# Allegro board tutorial.brd
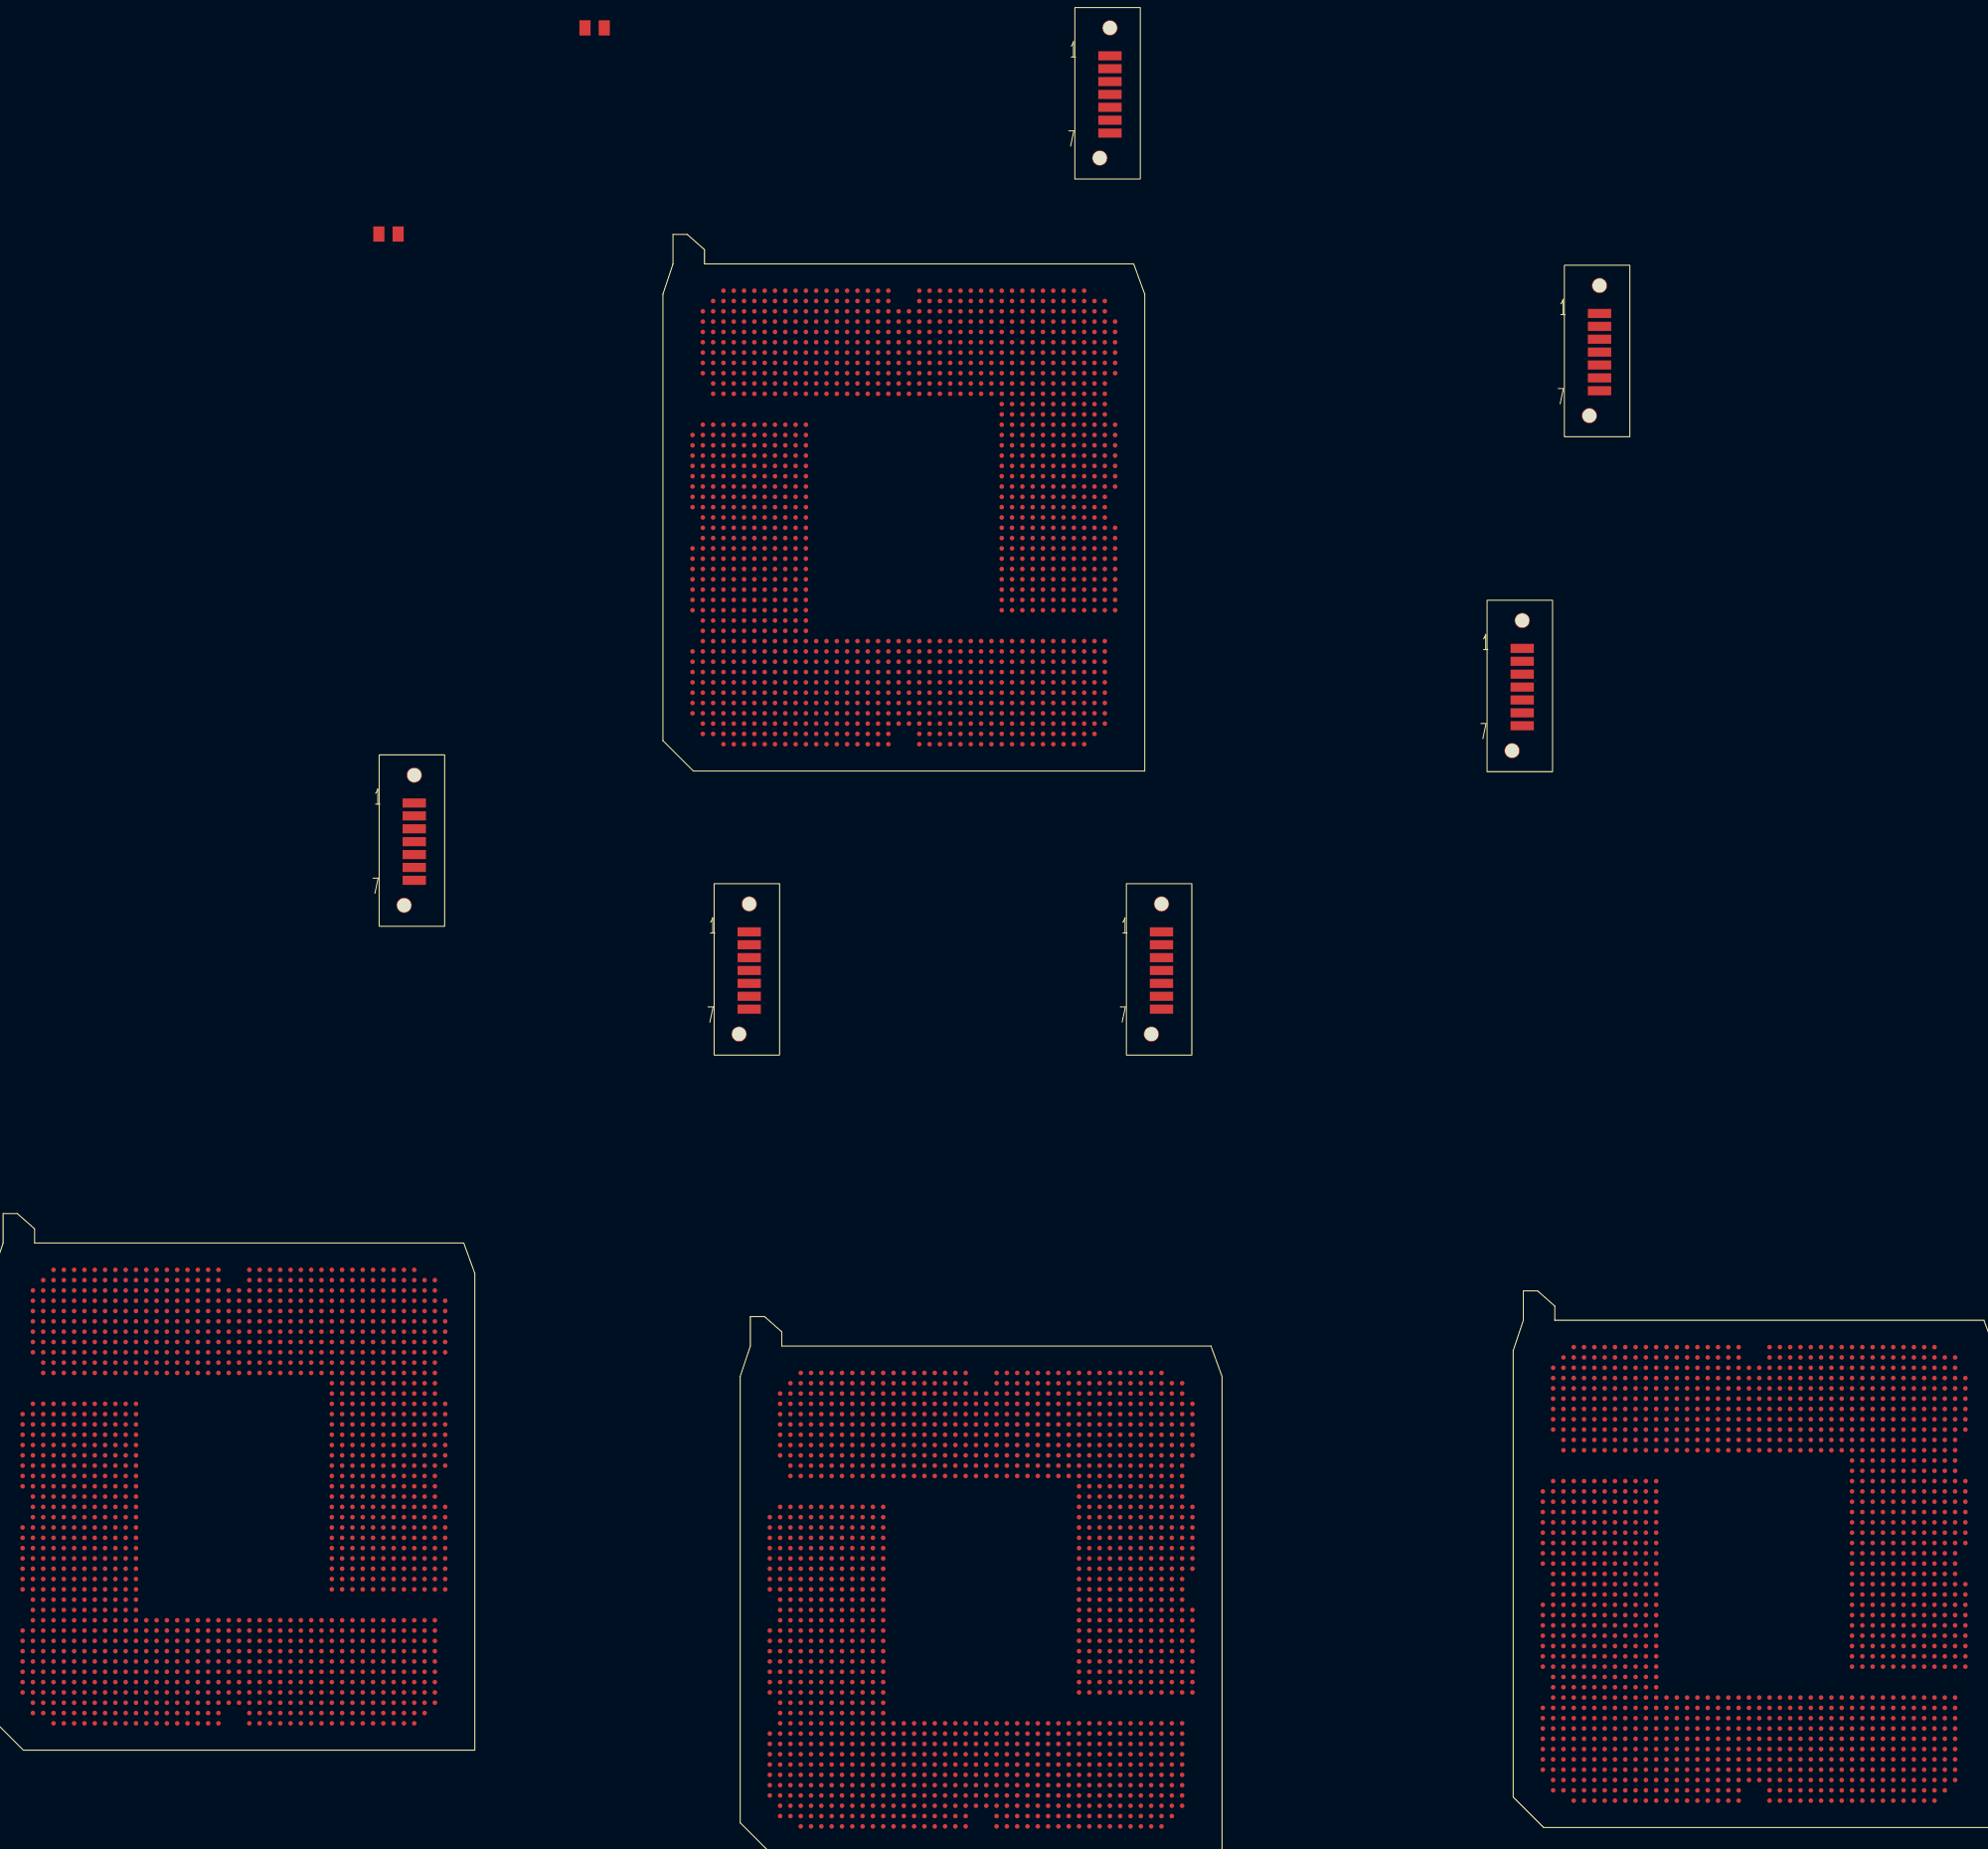
[diagram p0: board, top side]
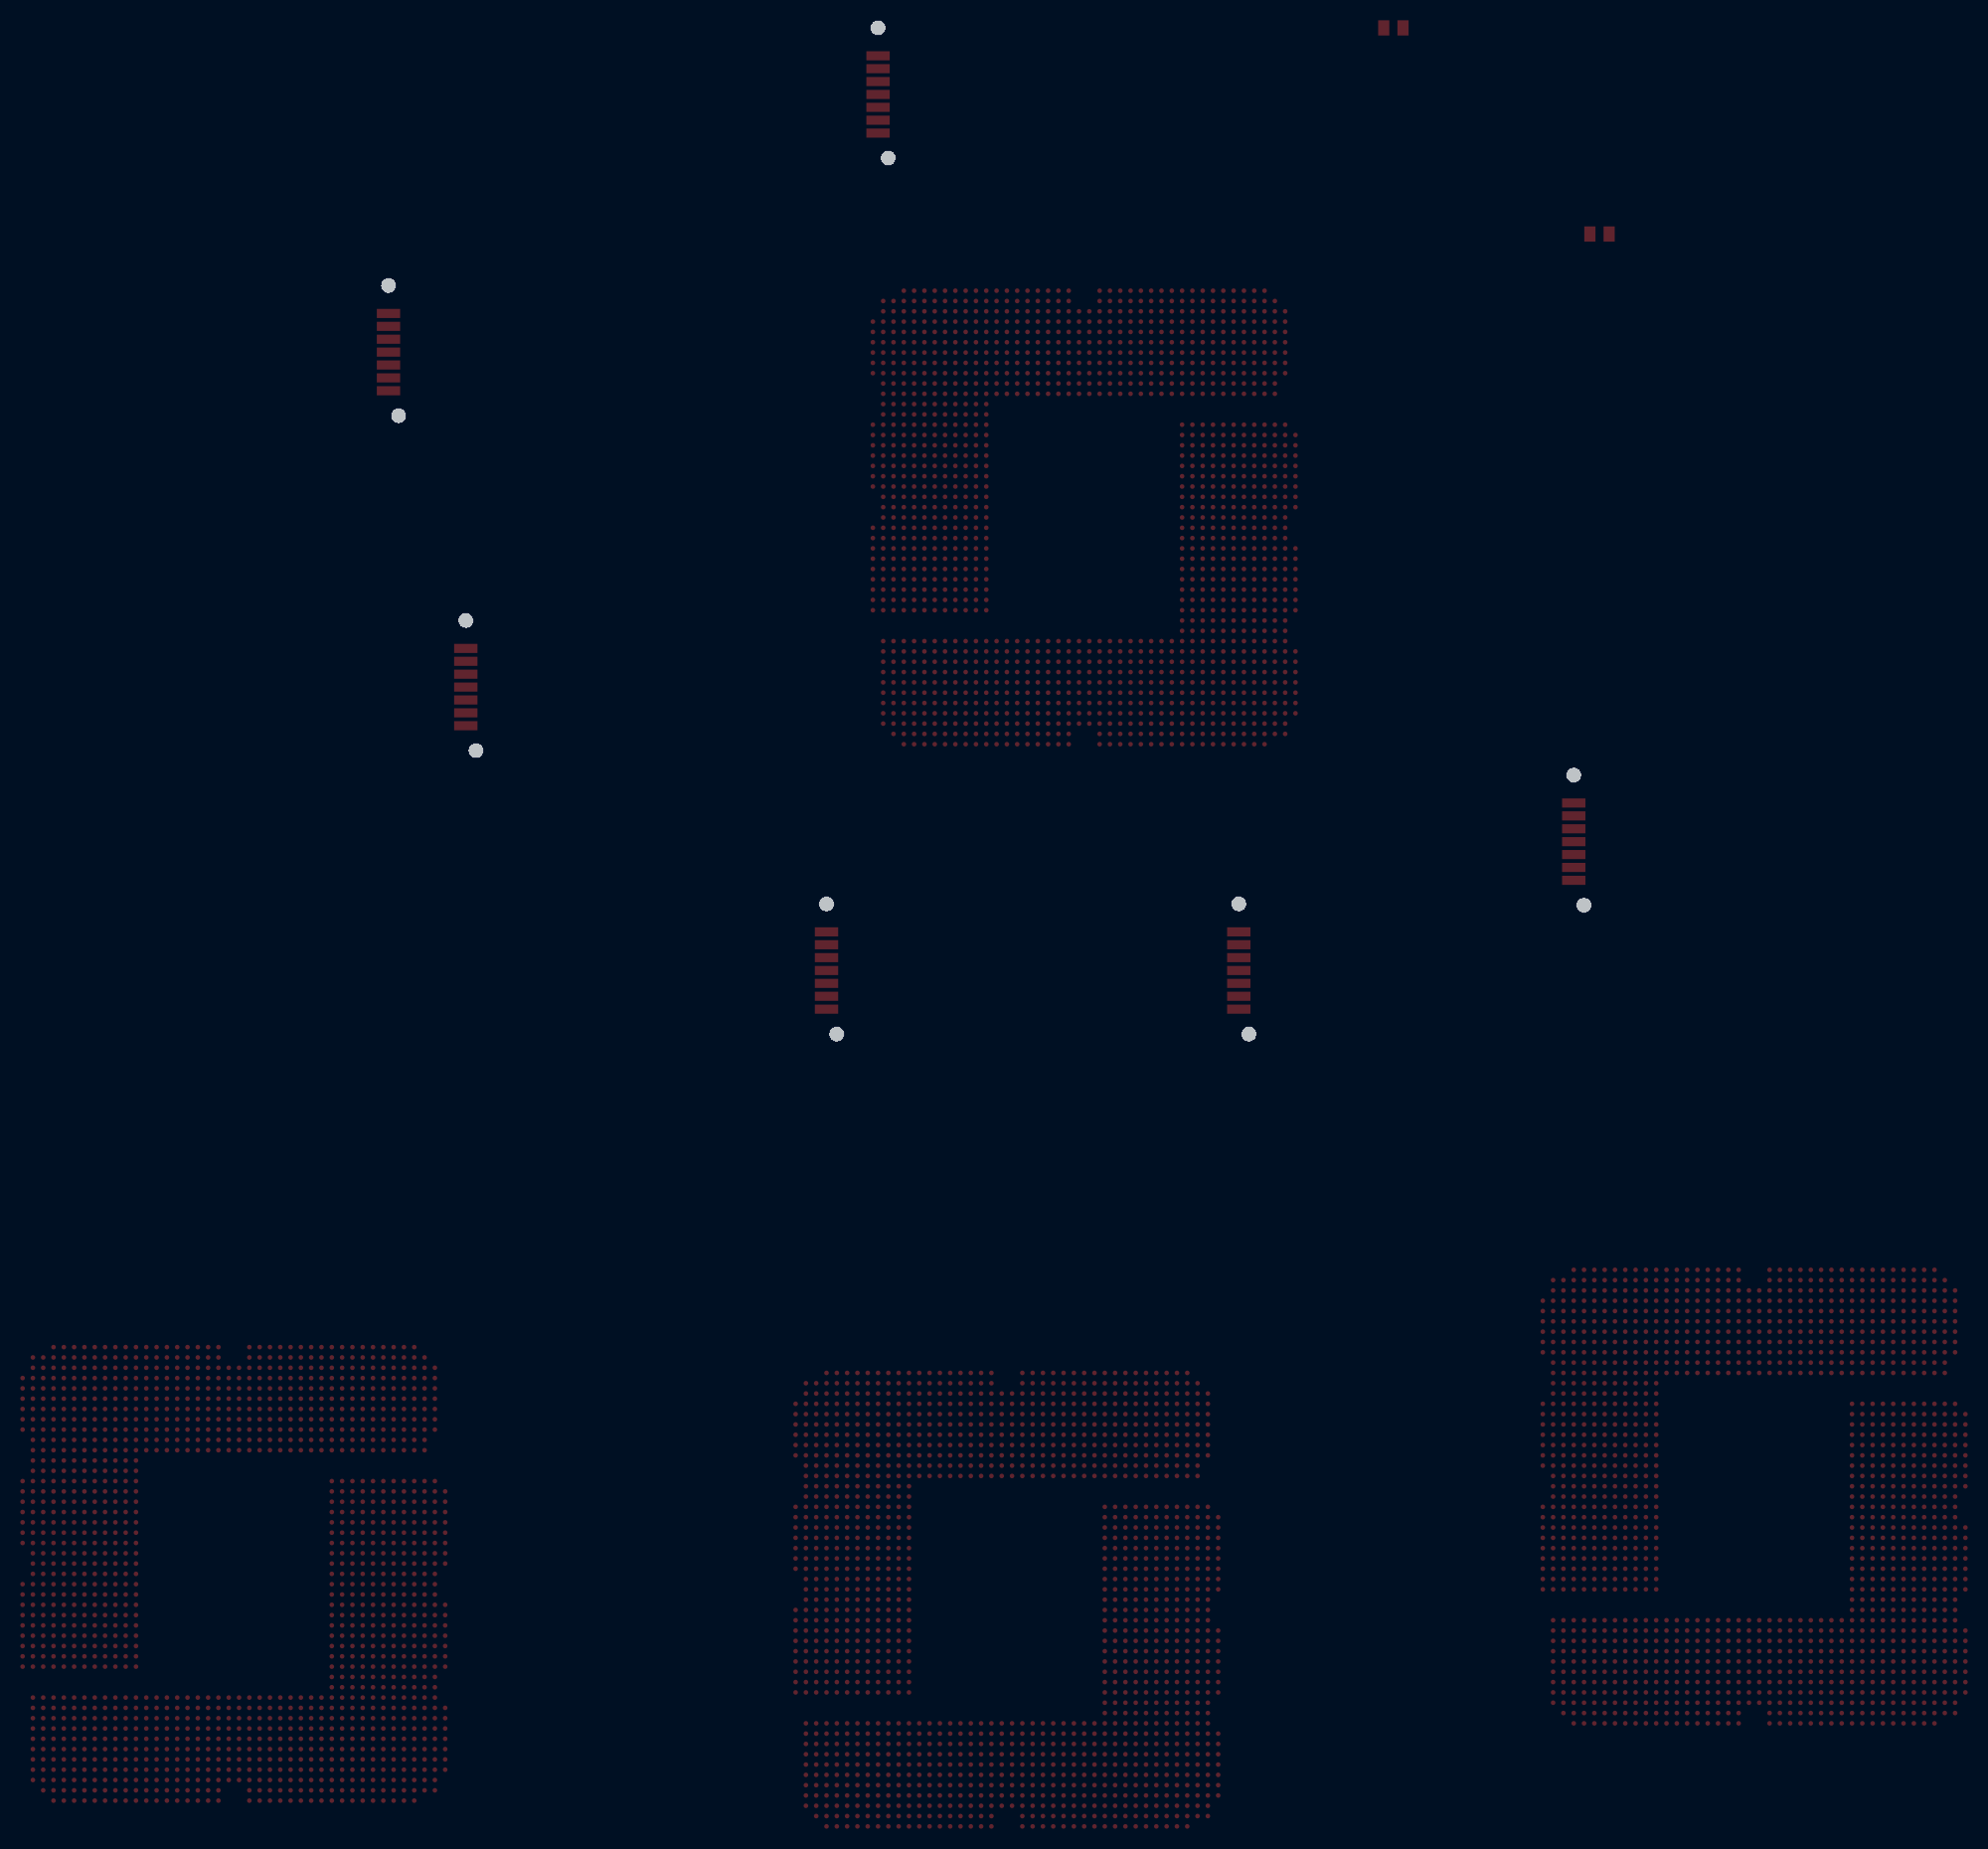
[diagram p1: board, bottom side, seen from below]

No outline. copper layers: TOP, GND_2, SIG_3H, SIG_4V, PWR_5, SIG_6H, SIG_7V, PWR_8, GND_9, PWR_10, GND_11, SIG_12H, SIG_13V, GND_14, SIG_15V, SIG_16V, PWR_17, BOTTOM. Coordinates in mm from the lowest, leftmost part position.

## Design rules (mm)
constraint set DEFAULT: min track width 0.102, pair gap 0.102
net group SATA_TX_P<1>: nets SATA_TX_P<1> SATA_TX_P_X<1>
net group SATA_TX_P<4>: nets _N93 SATA_TX_P<4>
net group VIDBUS: nets PRDY* PSI*
net group BPM_BUS: nets BPM_BUS<0> BPM_BUS<1> BPM_BUS<2> BPM_BUS<3> BPM_BUS<4> BPM_BUS<5> BPM_BUS<6> BPM_BUS<7>
net group DDR_COMP: nets DDR_COMP<0> DDR_COMP<1> DDR_COMP<2>
net group SATA_RX_N: nets SATA_RX_N<0> SATA_RX_N<1> SATA_RX_N<2> SATA_RX_N<3> SATA_RX_N<4> SATA_RX_N<5>
net group SATA_RX_P: nets SATA_RX_P<0> SATA_RX_P<1> SATA_RX_P<2> SATA_RX_P<3> SATA_RX_P<4> SATA_RX_P<5>
net group SATA_TX_N: nets SATA_TX_N<0> SATA_TX_N<1> SATA_TX_N<2> SATA_TX_N<3> SATA_TX_N<4> SATA_TX_N<5>
net group SATA_TX_P: nets SATA_TX_P<0> SATA_TX_P<2> SATA_TX_P<3> SATA_TX_P<5>
net group VID: nets VID<1> VID<2> VID<3> VID<4> VID<5> VID<6> VID<7>

## Placement (name value [footprint] x y rotation side)
J2  -  [SATA_VERT1P27]  50.8 68.58 0 top
J101  -  [SATA_VERT1P27]  86.36 154.94 0 top
J0501  -  [SATA_VERT1P27]  17.78 81.28 0 top
J0502  -  [SATA_VERT1P27]  91.44 68.58 0 top
J0503  -  [SATA_VERT1P27]  127 96.52 0 top
J0504  -  [SATA_VERT1P27]  134.62 129.54 0 top
R0500  1.1K  [RESC2012N]  35.56 154.94 0 top
R0501  1.1K  [RESC2012N]  15.24 134.62 0 top
U0500  -  [LGA1366_SKT]  66.04 106.68 0 top
U0501  -  [LGA1366_SKT]  73.66 0 0 top
U0504  -  [LGA1366_SKT]  0 10.16 0 top
U0509  -  [LGA1366_SKT]  149.86 2.54 0 top

## Library data of the parts
J2 J101 J0501 J0502 J0503 J0504 = SATA: part number: SATA_TH-CDN-CON-0014
R0500 R0501 = RES: part number: RES_0805-CDN-RES-0290,1.1K,0.125W,1%
U0500 U0501 U0504 U0509 = VIPER_ASIC: part number: VIPER_ASIC_FCBGA-CDN-MPU-000009

## Footprints (pads in the part's own frame, mm; a bottom-side part is the same pattern mirrored in y, then rotated)
LGA1366_SKT
  round 0.457 smd: A4(-20.828,-19.304) A5(-20.828,-18.288) A6(-20.828,-17.272) A7(-20.828,-16.256) A8(-20.828,-15.24) A9(-20.828,-14.224) A10(-20.828,-13.208) A14(-20.828,-9.144) A15(-20.828,-8.128) A16(-20.828,-7.112) A17(-20.828,-6.096) A18(-20.828,-5.08) A19(-20.828,-4.064) A20(-20.828,-3.048) A24(-20.828,1.016) A25(-20.828,2.032) A26(-20.828,3.048) A27(-20.828,4.064) A28(-20.828,5.08) A29(-20.828,6.096) A30(-20.828,7.112) A31(-20.828,8.128) A35(-19.812,14.224) A36(-19.812,15.24) A37(-19.812,16.256) A38(-19.812,17.272) A39(-19.812,18.288) A40(-19.812,19.304) A41(-19.812,20.32) AA3(-0.508,-20.32) AA4(-0.508,-19.304) AA5(-0.508,-18.288) AA6(-0.508,-17.272) AA7(-0.508,-16.256) AA8(-0.508,-15.24) AA9(-0.508,-14.224) AA10(-0.508,-13.208) AA11(-0.508,-12.192) AA33(0.508,12.192) AA34(0.508,13.208) AA35(0.508,14.224) AA36(0.508,15.24) AA37(0.508,16.256) AA38(0.508,17.272) AA39(0.508,18.288) AA40(0.508,19.304) AA41(0.508,20.32) AB3(0.508,-20.32) AB4(0.508,-19.304) AB5(0.508,-18.288) AB6(0.508,-17.272) AB7(0.508,-16.256) AB8(0.508,-15.24) AB9(0.508,-14.224) AB10(0.508,-13.208) AB11(0.508,-12.192) AB33(1.524,12.192) AB34(1.524,13.208) AB35(1.524,14.224) AB36(1.524,15.24) AB37(1.524,16.256) AB38(1.524,17.272) AB39(1.524,18.288) AB40(1.524,19.304) AB41(1.524,20.32) AB42(1.524,21.336) AB43(1.524,22.352) AC1(1.524,-22.352) AC2(1.524,-21.336) AC3(1.524,-20.32) AC4(1.524,-19.304) AC5(1.524,-18.288) AC6(1.524,-17.272) AC7(1.524,-16.256) AC8(1.524,-15.24) AC9(1.524,-14.224) AC10(1.524,-13.208) AC11(1.524,-12.192) AC33(2.54,12.192) AC34(2.54,13.208) AC35(2.54,14.224) AC36(2.54,15.24) AC37(2.54,16.256) AC38(2.54,17.272) AC39(2.54,18.288) AC40(2.54,19.304) AC41(2.54,20.32) AC42(2.54,21.336) AC43(2.54,22.352) AD1(2.54,-22.352) AD2(2.54,-21.336) AD3(2.54,-20.32) AD4(2.54,-19.304) AD5(2.54,-18.288) AD6(2.54,-17.272) AD7(2.54,-16.256) AD8(2.54,-15.24) AD9(2.54,-14.224) AD10(2.54,-13.208) AD11(2.54,-12.192) AD33(3.556,12.192) AD34(3.556,13.208) AD35(3.556,14.224) AD36(3.556,15.24) AD37(3.556,16.256) AD38(3.556,17.272) AD39(3.556,18.288) AD40(3.556,19.304) AD41(3.556,20.32) AD42(3.556,21.336) AD43(3.556,22.352) AE1(3.556,-22.352) AE2(3.556,-21.336) AE3(3.556,-20.32) AE4(3.556,-19.304) AE5(3.556,-18.288) AE6(3.556,-17.272) AE7(3.556,-16.256) AE8(3.556,-15.24) AE9(3.556,-14.224) AE10(3.556,-13.208) AE11(3.556,-12.192) AE33(4.572,12.192) AE34(4.572,13.208) AE35(4.572,14.224) AE36(4.572,15.24) AE37(4.572,16.256) AE38(4.572,17.272) AE39(4.572,18.288) AE40(4.572,19.304) AE41(4.572,20.32) AE42(4.572,21.336) AE43(4.572,22.352) AF1(4.572,-22.352) AF2(4.572,-21.336) AF3(4.572,-20.32) AF4(4.572,-19.304) AF5(4.572,-18.288) AF6(4.572,-17.272) AF7(4.572,-16.256) AF8(4.572,-15.24) AF9(4.572,-14.224) AF10(4.572,-13.208) AF11(4.572,-12.192) AF33(5.588,12.192) AF34(5.588,13.208) AF35(5.588,14.224) AF36(5.588,15.24) AF37(5.588,16.256) AF38(5.588,17.272) AF39(5.588,18.288) AF40(5.588,19.304) AF41(5.588,20.32) AF42(5.588,21.336) AF43(5.588,22.352) AG1(5.588,-22.352) AG2(5.588,-21.336) AG3(5.588,-20.32) AG4(5.588,-19.304) AG5(5.588,-18.288) AG6(5.588,-17.272) AG7(5.588,-16.256) AG8(5.588,-15.24) AG9(5.588,-14.224) AG10(5.588,-13.208) AG11(5.588,-12.192) AG33(6.604,12.192) AG34(6.604,13.208) AG35(6.604,14.224) AG36(6.604,15.24) AG37(6.604,16.256) AG38(6.604,17.272) AG39(6.604,18.288) AG40(6.604,19.304) AG41(6.604,20.32) AG42(6.604,21.336) AG43(6.604,22.352) AH1(6.604,-22.352) AH2(6.604,-21.336) AH3(6.604,-20.32) AH4(6.604,-19.304) AH5(6.604,-18.288) AH6(6.604,-17.272) AH7(6.604,-16.256) AH8(6.604,-15.24) AH9(6.604,-14.224) AH10(6.604,-13.208) AH11(6.604,-12.192) AH33(7.62,12.192) AH34(7.62,13.208) AH35(7.62,14.224) AH36(7.62,15.24) AH37(7.62,16.256) AH38(7.62,17.272) AH39(7.62,18.288) AH40(7.62,19.304) AH41(7.62,20.32) AH42(7.62,21.336) AH43(7.62,22.352) AJ1(7.62,-22.352) AJ2(7.62,-21.336) AJ3(7.62,-20.32) AJ4(7.62,-19.304) AJ5(7.62,-18.288) AJ6(7.62,-17.272) AJ7(7.62,-16.256) AJ8(7.62,-15.24) AJ9(7.62,-14.224) AJ10(7.62,-13.208) AJ11(7.62,-12.192) AJ33(8.636,12.192) AJ34(8.636,13.208) AJ35(8.636,14.224) AJ36(8.636,15.24) AJ37(8.636,16.256) AJ38(8.636,17.272) AJ39(8.636,18.288) AJ40(8.636,19.304) AJ41(8.636,20.32) AJ42(8.636,21.336) AJ43(8.636,22.352) AK1(8.636,-22.352) AK2(8.636,-21.336) AK3(8.636,-20.32) AK4(8.636,-19.304) AK5(8.636,-18.288) AK6(8.636,-17.272) AK7(8.636,-16.256) AK8(8.636,-15.24) AK9(8.636,-14.224) AK10(8.636,-13.208) AK11(8.636,-12.192) AK12(9.652,-9.144) AK13(9.652,-8.128) AK14(9.652,-7.112) AK15(9.652,-6.096) AK16(9.652,-5.08) AK17(9.652,-4.064) AK18(9.652,-3.048) AK19(9.652,-2.032) AK20(9.652,-1.016) AK21(9.652,0) AK22(9.652,1.016) AK23(9.652,2.032) AK24(9.652,3.048) AK25(9.652,4.064) AK26(9.652,5.08) AK27(9.652,6.096) AK28(9.652,7.112) AK29(9.652,8.128) AK30(9.652,9.144) AK31(9.652,10.16) AK32(9.652,11.176) AK33(9.652,12.192) AK34(9.652,13.208) AK35(9.652,14.224) AK36(9.652,15.24) AK37(9.652,16.256) AK38(9.652,17.272) AK39(9.652,18.288) AK40(9.652,19.304) AK41(9.652,20.32) AK42(9.652,21.336) AK43(9.652,22.352) AL1(9.652,-22.352) AL2(9.652,-21.336) AL3(9.652,-20.32) AL4(9.652,-19.304) AL5(9.652,-18.288) AL6(9.652,-17.272) AL7(9.652,-16.256) AL8(9.652,-15.24) AL9(9.652,-14.224) AL10(9.652,-13.208) AL11(9.652,-12.192) AL12(10.668,-9.144) AL13(10.668,-8.128) AL14(10.668,-7.112) AL15(10.668,-6.096) AL16(10.668,-5.08) AL17(10.668,-4.064) AL18(10.668,-3.048) AL19(10.668,-2.032) AL20(10.668,-1.016) AL21(10.668,0) AL22(10.668,1.016) AL23(10.668,2.032) AL24(10.668,3.048) AL25(10.668,4.064) AL26(10.668,5.08) AL27(10.668,6.096) AL28(10.668,7.112) AL29(10.668,8.128) AL30(10.668,9.144) AL31(10.668,10.16) AL32(10.668,11.176) AL33(10.668,12.192) AL34(10.668,13.208) AL35(10.668,14.224) AL36(10.668,15.24) AL37(10.668,16.256) AL38(10.668,17.272) AL39(10.668,18.288) AL40(10.668,19.304) AL41(10.668,20.32) AL42(10.668,21.336) AL43(10.668,22.352) AM1(10.668,-22.352) AM2(10.668,-21.336) AM3(10.668,-20.32) AM4(10.668,-19.304) AM5(10.668,-18.288) AM6(10.668,-17.272) AM7(10.668,-16.256) AM8(10.668,-15.24) AM9(10.668,-14.224) AM10(10.668,-13.208) AM11(10.668,-12.192) AM12(11.684,-9.144) AM13(11.684,-8.128) AM14(11.684,-7.112) AM15(11.684,-6.096) AM16(11.684,-5.08) AM17(11.684,-4.064) AM18(11.684,-3.048) AM19(11.684,-2.032) AM20(11.684,-1.016) AM21(11.684,0) AM22(11.684,1.016) AM23(11.684,2.032) AM24(11.684,3.048) AM25(11.684,4.064) AM26(11.684,5.08) AM27(11.684,6.096) AM28(11.684,7.112) AM29(11.684,8.128) AM30(11.684,9.144) AM31(11.684,10.16) AM32(11.684,11.176) AM33(11.684,12.192) AM34(11.684,13.208) AM35(11.684,14.224) AM36(11.684,15.24) AM37(11.684,16.256) AM38(11.684,17.272) AM39(11.684,18.288) AM40(11.684,19.304) AM41(11.684,20.32) AM42(11.684,21.336) AM43(11.684,22.352) AN1(11.684,-22.352) AN2(11.684,-21.336) AN3(11.684,-20.32) AN4(11.684,-19.304) AN5(11.684,-18.288) AN6(11.684,-17.272) AN7(11.684,-16.256) AN8(11.684,-15.24) AN9(11.684,-14.224) AN10(11.684,-13.208) AN11(11.684,-12.192) AN12(12.7,-9.144) AN13(12.7,-8.128) AN14(12.7,-7.112) AN15(12.7,-6.096) AN16(12.7,-5.08) AN17(12.7,-4.064) AN18(12.7,-3.048) AN19(12.7,-2.032) AN20(12.7,-1.016) AN21(12.7,0) AN22(12.7,1.016) AN23(12.7,2.032) AN24(12.7,3.048) AN25(12.7,4.064) AN26(12.7,5.08) AN27(12.7,6.096) AN28(12.7,7.112) AN29(12.7,8.128) AN30(12.7,9.144) AN31(12.7,10.16) AN32(12.7,11.176) AN33(12.7,12.192) AN34(12.7,13.208) AN35(12.7,14.224) AN36(12.7,15.24) AN37(12.7,16.256) AN38(12.7,17.272) AN39(12.7,18.288) AN40(12.7,19.304) AN41(12.7,20.32) AN42(12.7,21.336) AN43(12.7,22.352) AP1(12.7,-22.352) AP2(12.7,-21.336) AP3(12.7,-20.32) AP4(12.7,-19.304) AP5(12.7,-18.288) AP6(12.7,-17.272) AP7(12.7,-16.256) AP8(12.7,-15.24) AP9(12.7,-14.224) AP10(12.7,-13.208) AP11(12.7,-12.192) AP12(13.716,-9.144) AP13(13.716,-8.128) AP14(13.716,-7.112) AP15(13.716,-6.096) AP16(13.716,-5.08) AP17(13.716,-4.064) AP18(13.716,-3.048) AP19(13.716,-2.032) AP20(13.716,-1.016) AP21(13.716,0) AP22(13.716,1.016) AP23(13.716,2.032) AP24(13.716,3.048) AP25(13.716,4.064) AP26(13.716,5.08) AP27(13.716,6.096) AP28(13.716,7.112) AP29(13.716,8.128) AP30(13.716,9.144) AP31(13.716,10.16) AP32(13.716,11.176) AP33(13.716,12.192) AP34(13.716,13.208) AP35(13.716,14.224) AP36(13.716,15.24) AP37(13.716,16.256) AP38(13.716,17.272) AP39(13.716,18.288) AP40(13.716,19.304) AP41(13.716,20.32) AP42(13.716,21.336) AP43(13.716,22.352) AR1(13.716,-22.352) AR2(13.716,-21.336) AR3(13.716,-20.32) AR4(13.716,-19.304) AR5(13.716,-18.288) AR6(13.716,-17.272) AR7(13.716,-16.256) AR8(13.716,-15.24) AR9(13.716,-14.224) AR10(13.716,-13.208) AR11(13.716,-12.192) AR12(14.732,-9.144) AR13(14.732,-8.128) AR14(14.732,-7.112) AR15(14.732,-6.096) AR16(14.732,-5.08) AR17(14.732,-4.064) AR18(14.732,-3.048) AR19(14.732,-2.032) AR20(14.732,-1.016) AR21(14.732,0) AR22(14.732,1.016) AR23(14.732,2.032) AR24(14.732,3.048) AR25(14.732,4.064) AR26(14.732,5.08) AR27(14.732,6.096) AR28(14.732,7.112) AR29(14.732,8.128) AR30(14.732,9.144) AR31(14.732,10.16) AR32(14.732,11.176) AR33(14.732,12.192) AR34(14.732,13.208) AR35(14.732,14.224) AR36(14.732,15.24) AR37(14.732,16.256) AR38(14.732,17.272) AR39(14.732,18.288) AR40(14.732,19.304) AR41(14.732,20.32) AR42(14.732,21.336) AR43(14.732,22.352) AT1(14.732,-22.352) AT2(14.732,-21.336) AT3(14.732,-20.32) AT4(14.732,-19.304) AT5(14.732,-18.288) AT6(14.732,-17.272) AT7(14.732,-16.256) AT8(14.732,-15.24) AT9(14.732,-14.224) AT10(14.732,-13.208) AT11(14.732,-12.192) AT12(15.748,-9.144) AT13(15.748,-8.128) AT14(15.748,-7.112) AT15(15.748,-6.096) AT16(15.748,-5.08) AT17(15.748,-4.064) AT18(15.748,-3.048) AT19(15.748,-2.032) AT20(15.748,-1.016) AT21(15.748,0) AT22(15.748,1.016) AT23(15.748,2.032) AT24(15.748,3.048) AT25(15.748,4.064) AT26(15.748,5.08) AT27(15.748,6.096) AT28(15.748,7.112) AT29(15.748,8.128) AT30(15.748,9.144) AT31(15.748,10.16) AT32(15.748,11.176) AT33(15.748,12.192) AT34(15.748,13.208) AT35(15.748,14.224) AT36(15.748,15.24) AT37(15.748,16.256) AT38(15.748,17.272) AT39(15.748,18.288) AT40(15.748,19.304) AT41(15.748,20.32) AT42(15.748,21.336) AT43(15.748,22.352) AU1(15.748,-22.352) AU2(15.748,-21.336) AU3(15.748,-20.32) AU4(15.748,-19.304) AU5(15.748,-18.288) AU6(15.748,-17.272) AU7(15.748,-16.256) AU8(15.748,-15.24) AU9(15.748,-14.224) AU10(15.748,-13.208) AU11(15.748,-12.192) AU12(16.764,-9.144) AU13(16.764,-8.128) AU14(16.764,-7.112) AU15(16.764,-6.096) AU16(16.764,-5.08) AU17(16.764,-4.064) AU18(16.764,-3.048) AU19(16.764,-2.032) AU20(16.764,-1.016) AU21(16.764,0) AU22(16.764,1.016) AU23(16.764,2.032) AU24(16.764,3.048) AU25(16.764,4.064) AU26(16.764,5.08) AU27(16.764,6.096) AU28(16.764,7.112) AU29(16.764,8.128) AU30(16.764,9.144) AU31(16.764,10.16) AU32(16.764,11.176) AU33(16.764,12.192) AU34(16.764,13.208) AU35(16.764,14.224) AU36(16.764,15.24) AU37(16.764,16.256) AU38(16.764,17.272) AU39(16.764,18.288) AU40(16.764,19.304) AU41(16.764,20.32) AU42(16.764,21.336) AU43(16.764,22.352) AV1(16.764,-22.352) AV2(16.764,-21.336) AV3(16.764,-20.32) AV4(16.764,-19.304) AV5(16.764,-18.288) AV6(16.764,-17.272) AV7(16.764,-16.256) AV8(16.764,-15.24) AV9(16.764,-14.224) AV10(16.764,-13.208) AV11(16.764,-12.192) AV12(17.78,-9.144) AV13(17.78,-8.128) AV14(17.78,-7.112) AV15(17.78,-6.096) AV16(17.78,-5.08) AV17(17.78,-4.064) AV18(17.78,-3.048) AV19(17.78,-2.032) AV20(17.78,-1.016) AV21(17.78,0) AV22(17.78,1.016) AV23(17.78,2.032) AV24(17.78,3.048) AV25(17.78,4.064) AV26(17.78,5.08) AV27(17.78,6.096) AV28(17.78,7.112) AV29(17.78,8.128) AV30(17.78,9.144) AV31(17.78,10.16) AV32(17.78,11.176) AV33(17.78,12.192) AV34(17.78,13.208) AV35(17.78,14.224) AV36(17.78,15.24) AV37(17.78,16.256) AV38(17.78,17.272) AV39(17.78,18.288) AV40(17.78,19.304) AV41(17.78,20.32) AV42(17.78,21.336) AV43(17.78,22.352) AW1(17.78,-22.352) AW2(17.78,-21.336) AW3(17.78,-20.32) AW4(17.78,-19.304) AW5(17.78,-18.288) AW6(17.78,-17.272) AW7(17.78,-16.256) AW8(17.78,-15.24) AW9(17.78,-14.224) AW10(17.78,-13.208) AW11(17.78,-12.192) AW12(18.796,-9.144) AW13(18.796,-8.128) AW14(18.796,-7.112) AW15(18.796,-6.096) AW16(18.796,-5.08) AW17(18.796,-4.064) AW18(18.796,-3.048) AW19(18.796,-2.032) AW20(18.796,-1.016) AW21(18.796,0) AW22(18.796,1.016) AW23(18.796,2.032) AW24(18.796,3.048) AW25(18.796,4.064) AW26(18.796,5.08) AW27(18.796,6.096) AW28(18.796,7.112) AW29(18.796,8.128) AW30(18.796,9.144) AW31(18.796,10.16) AW32(18.796,11.176) AW33(18.796,12.192) AW34(18.796,13.208) AW35(18.796,14.224) AW36(18.796,15.24) AW37(18.796,16.256) AW38(18.796,17.272) AW39(18.796,18.288) AW40(18.796,19.304) AW41(18.796,20.32) AW42(18.796,21.336) AY2(18.796,-21.336) AY3(18.796,-20.32) AY4(18.796,-19.304) AY5(18.796,-18.288) AY6(18.796,-17.272) AY7(18.796,-16.256) AY8(18.796,-15.24) AY9(18.796,-14.224) AY10(18.796,-13.208) AY11(18.796,-12.192) AY12(19.812,-9.144) AY13(19.812,-8.128) AY14(19.812,-7.112) AY15(19.812,-6.096) AY16(19.812,-5.08) AY17(19.812,-4.064) AY18(19.812,-3.048) AY19(19.812,-2.032) AY20(19.812,-1.016) AY21(19.812,0) AY22(19.812,1.016) AY23(19.812,2.032) AY24(19.812,3.048) AY25(19.812,4.064) AY26(19.812,5.08) AY27(19.812,6.096) AY28(19.812,7.112) AY29(19.812,8.128) AY30(19.812,9.144) AY31(19.812,10.16) AY32(19.812,11.176) AY33(19.812,12.192) AY34(19.812,13.208) AY35(19.812,14.224) AY36(19.812,15.24) AY37(19.812,16.256) AY38(19.812,17.272) AY39(19.812,18.288) AY40(19.812,19.304) AY41(19.812,20.32) AY42(19.812,21.336) B2(-19.812,-21.336) B3(-19.812,-20.32) B4(-19.812,-19.304) B5(-19.812,-18.288) B6(-19.812,-17.272) B7(-19.812,-16.256) B8(-19.812,-15.24) B9(-19.812,-14.224) B10(-19.812,-13.208) B11(-19.812,-12.192) B12(-19.812,-11.176) B13(-19.812,-10.16) B14(-19.812,-9.144) B15(-19.812,-8.128) B16(-19.812,-7.112) B17(-19.812,-6.096) B18(-19.812,-5.08) B19(-19.812,-4.064) B20(-19.812,-3.048) B21(-19.812,-2.032) B22(-19.812,-1.016) B23(-19.812,0) B24(-19.812,1.016) B25(-19.812,2.032) B26(-19.812,3.048) B27(-19.812,4.064) B28(-19.812,5.08) B29(-19.812,6.096) B30(-19.812,7.112) B31(-19.812,8.128) B32(-19.812,9.144) B33(-18.796,12.192) B34(-18.796,13.208) B35(-18.796,14.224) B36(-18.796,15.24) B37(-18.796,16.256) B38(-18.796,17.272) B39(-18.796,18.288) B40(-18.796,19.304) B41(-18.796,20.32) B42(-18.796,21.336) BA3(19.812,-20.32) BA4(19.812,-19.304) BA5(19.812,-18.288) BA6(19.812,-17.272) BA7(19.812,-16.256) BA8(19.812,-15.24) BA9(19.812,-14.224) BA10(19.812,-13.208) BA11(19.812,-12.192) BA12(20.828,-9.144) BA13(20.828,-8.128) BA14(20.828,-7.112) BA15(20.828,-6.096) BA16(20.828,-5.08) BA17(20.828,-4.064) BA18(20.828,-3.048) BA19(20.828,-2.032) BA20(20.828,-1.016) BA24(20.828,3.048) BA25(20.828,4.064) BA26(20.828,5.08) BA27(20.828,6.096) BA28(20.828,7.112) BA29(20.828,8.128) BA30(20.828,9.144) BA35(20.828,14.224) BA36(20.828,15.24) BA37(20.828,16.256) BA38(20.828,17.272) BA39(20.828,18.288) BA40(20.828,19.304) C2(-18.796,-21.336) C3(-18.796,-20.32) C4(-18.796,-19.304) C5(-18.796,-18.288) C6(-18.796,-17.272) C7(-18.796,-16.256) C8(-18.796,-15.24) C9(-18.796,-14.224) C10(-18.796,-13.208) C11(-18.796,-12.192) C12(-18.796,-11.176) C13(-18.796,-10.16) C14(-18.796,-9.144) C15(-18.796,-8.128) C16(-18.796,-7.112) C17(-18.796,-6.096) C18(-18.796,-5.08) C19(-18.796,-4.064) C20(-18.796,-3.048) C21(-18.796,-2.032) C22(-18.796,-1.016) C23(-18.796,0) C24(-18.796,1.016) C25(-18.796,2.032) C26(-18.796,3.048) C27(-18.796,4.064) C28(-18.796,5.08) C29(-18.796,6.096) C30(-18.796,7.112) C31(-18.796,8.128) C32(-18.796,9.144) C33(-17.78,12.192) C34(-17.78,13.208) C35(-17.78,14.224) C36(-17.78,15.24) C37(-17.78,16.256) C38(-17.78,17.272) C39(-17.78,18.288) C40(-17.78,19.304) C41(-17.78,20.32) C42(-17.78,21.336) C43(-17.78,22.352) D1(-17.78,-22.352) D2(-17.78,-21.336) D3(-17.78,-20.32) D4(-17.78,-19.304) D5(-17.78,-18.288) D6(-17.78,-17.272) D7(-17.78,-16.256) D8(-17.78,-15.24) D9(-17.78,-14.224) D10(-17.78,-13.208) D11(-17.78,-12.192) D12(-17.78,-11.176) D13(-17.78,-10.16) D14(-17.78,-9.144) D15(-17.78,-8.128) D16(-17.78,-7.112) D17(-17.78,-6.096) D18(-17.78,-5.08) D19(-17.78,-4.064) D20(-17.78,-3.048) D21(-17.78,-2.032) D22(-17.78,-1.016) D23(-17.78,0) D24(-17.78,1.016) D25(-17.78,2.032) D26(-17.78,3.048) D27(-17.78,4.064) D28(-17.78,5.08) D29(-17.78,6.096) D30(-17.78,7.112) D31(-17.78,8.128) D32(-17.78,9.144) D33(-16.764,12.192) D34(-16.764,13.208) D35(-16.764,14.224) D36(-16.764,15.24) D37(-16.764,16.256) D38(-16.764,17.272) D39(-16.764,18.288) D40(-16.764,19.304) D41(-16.764,20.32) D42(-16.764,21.336) D43(-16.764,22.352) E1(-16.764,-22.352) E2(-16.764,-21.336) E3(-16.764,-20.32) E4(-16.764,-19.304) E5(-16.764,-18.288) E6(-16.764,-17.272) E7(-16.764,-16.256) E8(-16.764,-15.24) E9(-16.764,-14.224) E10(-16.764,-13.208) E11(-16.764,-12.192) E12(-16.764,-11.176) E13(-16.764,-10.16) E14(-16.764,-9.144) E15(-16.764,-8.128) E16(-16.764,-7.112) E17(-16.764,-6.096) E18(-16.764,-5.08) E19(-16.764,-4.064) E20(-16.764,-3.048) E21(-16.764,-2.032) E22(-16.764,-1.016) E23(-16.764,0) E24(-16.764,1.016) E25(-16.764,2.032) E26(-16.764,3.048) E27(-16.764,4.064) E28(-16.764,5.08) E29(-16.764,6.096) E30(-16.764,7.112) E31(-16.764,8.128) E32(-16.764,9.144) E33(-15.748,12.192) E34(-15.748,13.208) E35(-15.748,14.224) E36(-15.748,15.24) E37(-15.748,16.256) E38(-15.748,17.272) E39(-15.748,18.288) E40(-15.748,19.304) E41(-15.748,20.32) E42(-15.748,21.336) E43(-15.748,22.352) F1(-15.748,-22.352) F2(-15.748,-21.336) F3(-15.748,-20.32) F4(-15.748,-19.304) F5(-15.748,-18.288) F6(-15.748,-17.272) F7(-15.748,-16.256) F8(-15.748,-15.24) F9(-15.748,-14.224) F10(-15.748,-13.208) F11(-15.748,-12.192) F12(-15.748,-11.176) F13(-15.748,-10.16) F14(-15.748,-9.144) F15(-15.748,-8.128) F16(-15.748,-7.112) F17(-15.748,-6.096) F18(-15.748,-5.08) F19(-15.748,-4.064) F20(-15.748,-3.048) F21(-15.748,-2.032) F22(-15.748,-1.016) F23(-15.748,0) F24(-15.748,1.016) F25(-15.748,2.032) F26(-15.748,3.048) F27(-15.748,4.064) F28(-15.748,5.08) F29(-15.748,6.096) F30(-15.748,7.112) F31(-15.748,8.128) F32(-15.748,9.144) F33(-14.732,12.192) F34(-14.732,13.208) F35(-14.732,14.224) F36(-14.732,15.24) F37(-14.732,16.256) F38(-14.732,17.272) F39(-14.732,18.288) F40(-14.732,19.304) F41(-14.732,20.32) F42(-14.732,21.336) F43(-14.732,22.352) G1(-14.732,-22.352) G2(-14.732,-21.336) G3(-14.732,-20.32) G4(-14.732,-19.304) G5(-14.732,-18.288) G6(-14.732,-17.272) G7(-14.732,-16.256) G8(-14.732,-15.24) G9(-14.732,-14.224) G10(-14.732,-13.208) G11(-14.732,-12.192) G12(-14.732,-11.176) G13(-14.732,-10.16) G14(-14.732,-9.144) G15(-14.732,-8.128) G16(-14.732,-7.112) G17(-14.732,-6.096) G18(-14.732,-5.08) G19(-14.732,-4.064) G20(-14.732,-3.048) G21(-14.732,-2.032) G22(-14.732,-1.016) G23(-14.732,0) G24(-14.732,1.016) G25(-14.732,2.032) G26(-14.732,3.048) G27(-14.732,4.064) G28(-14.732,5.08) G29(-14.732,6.096) G30(-14.732,7.112) G31(-14.732,8.128) G32(-14.732,9.144) G33(-13.716,12.192) G34(-13.716,13.208) G35(-13.716,14.224) G36(-13.716,15.24) G37(-13.716,16.256) G38(-13.716,17.272) G39(-13.716,18.288) G40(-13.716,19.304) G41(-13.716,20.32) G42(-13.716,21.336) G43(-13.716,22.352) H1(-13.716,-22.352) H2(-13.716,-21.336) H3(-13.716,-20.32) H4(-13.716,-19.304) H5(-13.716,-18.288) H6(-13.716,-17.272) H7(-13.716,-16.256) H8(-13.716,-15.24) H9(-13.716,-14.224) H10(-13.716,-13.208) H11(-13.716,-12.192) H12(-13.716,-11.176) H13(-13.716,-10.16) H14(-13.716,-9.144) H15(-13.716,-8.128) H16(-13.716,-7.112) H17(-13.716,-6.096) H18(-13.716,-5.08) H19(-13.716,-4.064) H20(-13.716,-3.048) H21(-13.716,-2.032) H22(-13.716,-1.016) H23(-13.716,0) H24(-13.716,1.016) H25(-13.716,2.032) H26(-13.716,3.048) H27(-13.716,4.064) H28(-13.716,5.08) H29(-13.716,6.096) H30(-13.716,7.112) H31(-13.716,8.128) H32(-13.716,9.144) H33(-12.7,12.192) H34(-12.7,13.208) H35(-12.7,14.224) H36(-12.7,15.24) H37(-12.7,16.256) H38(-12.7,17.272) H39(-12.7,18.288) H40(-12.7,19.304) H41(-12.7,20.32) H42(-12.7,21.336) H43(-12.7,22.352) J1(-12.7,-22.352) J2(-12.7,-21.336) J3(-12.7,-20.32) J4(-12.7,-19.304) J5(-12.7,-18.288) J6(-12.7,-17.272) J7(-12.7,-16.256) J8(-12.7,-15.24) J9(-12.7,-14.224) J10(-12.7,-13.208) J11(-12.7,-12.192) J12(-12.7,-11.176) J13(-12.7,-10.16) J14(-12.7,-9.144) J15(-12.7,-8.128) J16(-12.7,-7.112) J17(-12.7,-6.096) J18(-12.7,-5.08) J19(-12.7,-4.064) J20(-12.7,-3.048) J21(-12.7,-2.032) J22(-12.7,-1.016) J23(-12.7,0) J24(-12.7,1.016) J25(-12.7,2.032) J26(-12.7,3.048) J27(-12.7,4.064) J28(-12.7,5.08) J29(-12.7,6.096) J30(-12.7,7.112) J31(-12.7,8.128) J32(-12.7,9.144) J33(-11.684,12.192) J34(-11.684,13.208) J35(-11.684,14.224) J36(-11.684,15.24) J37(-11.684,16.256) J38(-11.684,17.272) J39(-11.684,18.288) J40(-11.684,19.304) J41(-11.684,20.32) J42(-11.684,21.336) J43(-11.684,22.352) K1(-11.684,-22.352) K2(-11.684,-21.336) K3(-11.684,-20.32) K4(-11.684,-19.304) K5(-11.684,-18.288) K6(-11.684,-17.272) K7(-11.684,-16.256) K8(-11.684,-15.24) K9(-11.684,-14.224) K10(-11.684,-13.208) K11(-11.684,-12.192) K12(-11.684,-11.176) K13(-11.684,-10.16) K14(-11.684,-9.144) K15(-11.684,-8.128) K16(-11.684,-7.112) K17(-11.684,-6.096) K18(-11.684,-5.08) K19(-11.684,-4.064) K20(-11.684,-3.048) K21(-11.684,-2.032) K22(-11.684,-1.016) K23(-11.684,0) K24(-11.684,1.016) K25(-11.684,2.032) K26(-11.684,3.048) K27(-11.684,4.064) K28(-11.684,5.08) K29(-11.684,6.096) K30(-11.684,7.112) K31(-11.684,8.128) K32(-11.684,9.144) K33(-10.668,12.192) K34(-10.668,13.208) K35(-10.668,14.224) K36(-10.668,15.24) K37(-10.668,16.256) K38(-10.668,17.272) K39(-10.668,18.288) K40(-10.668,19.304) K41(-10.668,20.32) K42(-10.668,21.336) K43(-10.668,22.352) L1(-10.668,-22.352) L2(-10.668,-21.336) L3(-10.668,-20.32) L4(-10.668,-19.304) L5(-10.668,-18.288) L6(-10.668,-17.272) L7(-10.668,-16.256) L8(-10.668,-15.24) L9(-10.668,-14.224) L10(-10.668,-13.208) L11(-10.668,-12.192) L12(-10.668,-11.176) L13(-10.668,-10.16) L14(-10.668,-9.144) L15(-10.668,-8.128) L16(-10.668,-7.112) L17(-10.668,-6.096) L18(-10.668,-5.08) L19(-10.668,-4.064) L20(-10.668,-3.048) L21(-10.668,-2.032) L22(-10.668,-1.016) L23(-10.668,0) L24(-10.668,1.016) L25(-10.668,2.032) L26(-10.668,3.048) L27(-10.668,4.064) L28(-10.668,5.08) L29(-10.668,6.096) L30(-10.668,7.112) L31(-10.668,8.128) L32(-10.668,9.144) L33(-9.652,12.192) L34(-9.652,13.208) L35(-9.652,14.224) L36(-9.652,15.24) L37(-9.652,16.256) L38(-9.652,17.272) L39(-9.652,18.288) L40(-9.652,19.304) L41(-9.652,20.32) L42(-9.652,21.336) L43(-9.652,22.352) M1(-9.652,-22.352) M2(-9.652,-21.336) M3(-9.652,-20.32) M4(-9.652,-19.304) M5(-9.652,-18.288) M6(-9.652,-17.272) M7(-9.652,-16.256) M8(-9.652,-15.24) M9(-9.652,-14.224) M10(-9.652,-13.208) M11(-9.652,-12.192) M12(-9.652,-11.176) M13(-9.652,-10.16) M14(-9.652,-9.144) M15(-9.652,-8.128) M16(-9.652,-7.112) M17(-9.652,-6.096) M18(-9.652,-5.08) M19(-9.652,-4.064) M20(-9.652,-3.048) M21(-9.652,-2.032) M22(-9.652,-1.016) M23(-9.652,0) M24(-9.652,1.016) M25(-9.652,2.032) M26(-9.652,3.048) M27(-9.652,4.064) M28(-9.652,5.08) M29(-9.652,6.096) M30(-9.652,7.112) M31(-9.652,8.128) M32(-9.652,9.144) M33(-8.636,12.192) M34(-8.636,13.208) M35(-8.636,14.224) M36(-8.636,15.24) M37(-8.636,16.256) M38(-8.636,17.272) M39(-8.636,18.288) M40(-8.636,19.304) M41(-8.636,20.32) M42(-8.636,21.336) M43(-8.636,22.352) N1(-8.636,-22.352) N2(-8.636,-21.336) N3(-8.636,-20.32) N4(-8.636,-19.304) N5(-8.636,-18.288) N6(-8.636,-17.272) N7(-8.636,-16.256) N8(-8.636,-15.24) N9(-8.636,-14.224) N10(-8.636,-13.208) N11(-8.636,-12.192) N33(-7.62,12.192) N34(-7.62,13.208) N35(-7.62,14.224) N36(-7.62,15.24) N37(-7.62,16.256) N38(-7.62,17.272) N39(-7.62,18.288) N40(-7.62,19.304) N41(-7.62,20.32) N42(-7.62,21.336) N43(-7.62,22.352) P1(-7.62,-22.352) P2(-7.62,-21.336) P3(-7.62,-20.32) P4(-7.62,-19.304) P5(-7.62,-18.288) P6(-7.62,-17.272) P7(-7.62,-16.256) P8(-7.62,-15.24) P9(-7.62,-14.224) P10(-7.62,-13.208) P11(-7.62,-12.192) P33(-6.604,12.192) P34(-6.604,13.208) P35(-6.604,14.224) P36(-6.604,15.24) P37(-6.604,16.256) P38(-6.604,17.272) P39(-6.604,18.288) P40(-6.604,19.304) P41(-6.604,20.32) P42(-6.604,21.336) P43(-6.604,22.352) R1(-6.604,-22.352) R2(-6.604,-21.336) R3(-6.604,-20.32) R4(-6.604,-19.304) R5(-6.604,-18.288) R6(-6.604,-17.272) R7(-6.604,-16.256) R8(-6.604,-15.24) R9(-6.604,-14.224) R10(-6.604,-13.208) R11(-6.604,-12.192) R33(-5.588,12.192) R34(-5.588,13.208) R35(-5.588,14.224) R36(-5.588,15.24) R37(-5.588,16.256) R38(-5.588,17.272) R39(-5.588,18.288) R40(-5.588,19.304) R41(-5.588,20.32) R42(-5.588,21.336) R43(-5.588,22.352) T1(-5.588,-22.352) T2(-5.588,-21.336) T3(-5.588,-20.32) T4(-5.588,-19.304) T5(-5.588,-18.288) T6(-5.588,-17.272) T7(-5.588,-16.256) T8(-5.588,-15.24) T9(-5.588,-14.224) T10(-5.588,-13.208) T11(-5.588,-12.192) T33(-4.572,12.192) T34(-4.572,13.208) T35(-4.572,14.224) T36(-4.572,15.24) T37(-4.572,16.256) T38(-4.572,17.272) T39(-4.572,18.288) T40(-4.572,19.304) T41(-4.572,20.32) T42(-4.572,21.336) T43(-4.572,22.352) U1(-4.572,-22.352) U2(-4.572,-21.336) U3(-4.572,-20.32) U4(-4.572,-19.304) U5(-4.572,-18.288) U6(-4.572,-17.272) U7(-4.572,-16.256) U8(-4.572,-15.24) U9(-4.572,-14.224) U10(-4.572,-13.208) U11(-4.572,-12.192) U33(-3.556,12.192) U34(-3.556,13.208) U35(-3.556,14.224) U36(-3.556,15.24) U37(-3.556,16.256) U38(-3.556,17.272) U39(-3.556,18.288) U40(-3.556,19.304) U41(-3.556,20.32) U42(-3.556,21.336) U43(-3.556,22.352) V1(-3.556,-22.352) V2(-3.556,-21.336) V3(-3.556,-20.32) V4(-3.556,-19.304) V5(-3.556,-18.288) V6(-3.556,-17.272) V7(-3.556,-16.256) V8(-3.556,-15.24) V9(-3.556,-14.224) V10(-3.556,-13.208) V11(-3.556,-12.192) V33(-2.54,12.192) V34(-2.54,13.208) V35(-2.54,14.224) V36(-2.54,15.24) V37(-2.54,16.256) V38(-2.54,17.272) V39(-2.54,18.288) V40(-2.54,19.304) V41(-2.54,20.32) V42(-2.54,21.336) V43(-2.54,22.352) W1(-2.54,-22.352) W2(-2.54,-21.336) W3(-2.54,-20.32) W4(-2.54,-19.304) W5(-2.54,-18.288) W6(-2.54,-17.272) W7(-2.54,-16.256) W8(-2.54,-15.24) W9(-2.54,-14.224) W10(-2.54,-13.208) W11(-2.54,-12.192) W33(-1.524,12.192) W34(-1.524,13.208) W35(-1.524,14.224) W36(-1.524,15.24) W37(-1.524,16.256) W38(-1.524,17.272) W39(-1.524,18.288) W40(-1.524,19.304) W41(-1.524,20.32) W42(-1.524,21.336) W43(-1.524,22.352) Y1(-1.524,-22.352) Y2(-1.524,-21.336) Y3(-1.524,-20.32) Y4(-1.524,-19.304) Y5(-1.524,-18.288) Y6(-1.524,-17.272) Y7(-1.524,-16.256) Y8(-1.524,-15.24) Y9(-1.524,-14.224) Y10(-1.524,-13.208) Y11(-1.524,-12.192) Y33(-0.508,12.192) Y34(-0.508,13.208) Y35(-0.508,14.224) Y36(-0.508,15.24) Y37(-0.508,16.256) Y38(-0.508,17.272) Y39(-0.508,18.288) Y40(-0.508,19.304) Y41(-0.508,20.32)
RESC2012N
  rect 1.1x1.5 smd: 1(-0.95,0) 2(0.95,0)
SATA_VERT1P27
  rect 2.3x0.9 smd: 1(0,-2.75) 2(0,-4.02) 3(0,-5.29) 4(0,-6.56) 5(0,-7.83) 6(0,-9.1) 7(0,-10.37)
  round 1.5 hole 1.35: MT1(0,0) MT2(-1,-12.83)

## Nets
GND: U0500.A4 U0500.A6 U0500.A35 U0500.A41 U0500.AA3 U0500.AA9 U0500.AA34 U0500.AA38 U0500.AA39 U0500.AB4 U0500.AB7 U0500.AB37 U0500.AB40 U0500.AB42 U0500.AC2 U0500.AC5 U0500.AC7 U0500.AC9 U0500.AC36 U0500.AD11 U0500.AD33 U0500.AE2 U0500.AE7 U0500.AF5 U0500.AF35 U0500.AF38 U0500.AG3 U0500.AG9 U0500.AG11 U0500.AG33 U0500.AG43 U0500.AH1 U0500.AH7 U0500.AH34 U0500.AH37 U0500.AH38 U0500.AH39 U0500.AJ5 U0500.AJ34 U0500.AJ36 U0500.AK3 U0500.AK9 U0500.AK10 U0500.AK14 U0500.AK17 U0500.AK20 U0500.AK26 U0500.AK29 U0500.AK32 U0500.AK34 U0500.AK39 U0500.AL1 U0500.AL2 U0500.AL7 U0500.AL11 U0500.AL17 U0500.AL22 U0500.AL23 U0500.AL29 U0500.AL35 U0500.AL36 U0500.AM5 U0500.AM9 U0500.AM11 U0500.AM14 U0500.AM17 U0500.AM20 U0500.AM26 U0500.AM29 U0500.AM32 U0500.AM35 U0500.AM37 U0500.AM39 U0500.AN3 U0500.AN7 U0500.AN11 U0500.AN17 U0500.AN22 U0500.AN23 U0500.AN29 U0500.AN35 U0500.AP1 U0500.AP5 U0500.AP6 U0500.AP10 U0500.AP11 U0500.AP14 U0500.AP26 U0500.AP29 U0500.AP32 U0500.AP35 U0500.AP36 U0500.AP37 U0500.AP43 U0500.AR2 U0500.AR3 U0500.AR11 U0500.AR14 U0500.AR16 U0500.AR17 U0500.AR20 U0500.AR21 U0500.AR22 U0500.AR23 U0500.AR26 U0500.AR29 U0500.AR32 U0500.AR35 U0500.AR39 U0500.AT7 U0500.AT8 U0500.AT11 U0500.AT14 U0500.AT18 U0500.AT19 U0500.AT26 U0500.AT29 U0500.AT32 U0500.AT35 U0500.AT38 U0500.AU1 U0500.AU5 U0500.AU11 U0500.AU14 U0500.AU16 U0500.AU17 U0500.AU20 U0500.AU21 U0500.AU22 U0500.AU23 U0500.AU26 U0500.AU29 U0500.AU32 U0500.AU35 U0500.AU36 U0500.AV4 U0500.AV11 U0500.AV14 U0500.AV18 U0500.AV19 U0500.AV26 U0500.AV29 U0500.AV32 U0500.AW1 U0500.AW6 U0500.AW8 U0500.AW11 U0500.AW14 U0500.AW16 U0500.AW17 U0500.AW20 U0500.AW21 U0500.AW22 U0500.AW23 U0500.AW26 U0500.AW29 U0500.AW32 U0500.AY2 U0500.AY7 U0500.AY11 U0500.AY14 U0500.AY18 U0500.AY19 U0500.AY26 U0500.AY29 U0500.AY32 U0500.AY37 U0500.AY42 U0500.B2 U0500.B37 U0500.B42 U0500.BA3 U0500.BA5 U0500.BA11 U0500.BA14 U0500.BA16 U0500.BA17 U0500.BA20 U0500.BA26 U0500.BA35 U0500.BA39 U0500.C5 U0500.C35 U0500.C40 U0500.C43 U0500.D3 U0500.D8 U0500.D9 U0500.D33 U0500.D43 U0500.E1 U0500.E6 U0500.E17 U0500.E36 U0500.E38 U0500.E41 U0500.F4 U0500.F9 U0500.F14 U0500.F15 U0500.F20 U0500.F29 U0500.F34 U0500.F38 U0500.F39 U0500.F40 U0500.G2 U0500.G7 U0500.G12 U0500.G16 U0500.G18 U0500.G21 U0500.G23 U0500.G25 U0500.G32 U0500.G37 U0500.G39 U0500.G40 U0500.G42 U0500.H5 U0500.H10 U0500.H17 U0500.H21 U0500.H22 U0500.H23 U0500.H24 U0500.H30 U0500.H35 U0500.H37 U0500.H39 U0500.H40 U0500.J3 U0500.J8 U0500.J13 U0500.J20 U0500.J21 U0500.J22 U0500.J24 U0500.J33 U0500.J37 U0500.J38 U0500.J39 U0500.J40 U0500.J43 U0500.K1 U0500.K6 U0500.K11 U0500.K14 U0500.K17 U0500.K20 U0500.K22 U0500.K23 U0500.K31 U0500.K36 U0500.K38 U0500.K39 U0500.K41 U0500.L4 U0500.L9 U0500.L20 U0500.L21 U0500.L22 U0500.L25 U0500.L29 U0500.L34 U0500.L39 U0500.L40 U0500.M2 U0500.M7 U0500.M12 U0500.M14 U0500.M16 U0500.M18 U0500.M20 U0500.M22 U0500.M24 U0500.M26 U0500.M28 U0500.M30 U0500.M32 U0500.M37 U0500.M39 U0500.M40 U0500.M42 U0500.N5 U0500.N10 U0500.N35 U0500.N36 U0500.N40 U0500.P3 U0500.P8 U0500.P11 U0500.P33 U0500.P38 U0500.P40 U0500.P43 U0500.R1 U0500.R6 U0500.R36 U0500.R39 U0500.R40 U0500.R41 U0500.T4 U0500.T9 U0500.T34 U0500.T38 U0500.T39 U0500.T40 U0500.T41 U0500.U2 U0500.U7 U0500.U34 U0500.U36 U0500.U37 U0500.U38 U0500.U39 U0500.U42 U0500.V5 U0500.V10 U0500.V34 U0500.V35 U0500.V36 U0500.V37 U0500.V38 U0500.V39 U0500.V40 U0500.W3 U0500.W8 U0500.W34 U0500.W35 U0500.W38 U0500.W39 U0500.W43 U0500.Y1 U0500.Y6 U0500.Y11 U0500.Y33 U0500.Y36 U0500.Y41 U0501.A4 U0501.A6 U0501.A35 U0501.A41 U0501.AA3 U0501.AA9 U0501.AA34 U0501.AA38 U0501.AA39 U0501.AB4 U0501.AB7 U0501.AB37 U0501.AB40 U0501.AB42 U0501.AC2 U0501.AC5 U0501.AC7 U0501.AC9 U0501.AC36 U0501.AD11 U0501.AD33 U0501.AE2 U0501.AE7 U0501.AF5 U0501.AF35 U0501.AF38 U0501.AG3 U0501.AG9 U0501.AG11 U0501.AG33 U0501.AG43 U0501.AH1 U0501.AH7 U0501.AH34 U0501.AH37 U0501.AH38 U0501.AH39 U0501.AJ5 U0501.AJ34 U0501.AJ36 U0501.AK3 U0501.AK9 U0501.AK10 U0501.AK14 U0501.AK17 U0501.AK20 U0501.AK26 U0501.AK29 U0501.AK32 U0501.AK34 U0501.AK39 U0501.AL1 U0501.AL2 U0501.AL7 U0501.AL11 U0501.AL17 U0501.AL22 U0501.AL23 U0501.AL29 U0501.AL35 U0501.AL36 U0501.AM5 U0501.AM9 U0501.AM11 U0501.AM14 U0501.AM17 U0501.AM20 U0501.AM26 U0501.AM29 U0501.AM32 U0501.AM35 U0501.AM37 U0501.AM39 U0501.AN3 U0501.AN7 U0501.AN11 U0501.AN17 U0501.AN22 U0501.AN23 U0501.AN29 U0501.AN35 U0501.AP1 U0501.AP5 U0501.AP6 U0501.AP10 U0501.AP11 U0501.AP14 U0501.AP26 U0501.AP29 U0501.AP32 U0501.AP35 U0501.AP36 U0501.AP37 U0501.AP43 U0501.AR2 U0501.AR3 U0501.AR11 U0501.AR14 U0501.AR16 U0501.AR17 U0501.AR20 U0501.AR21 U0501.AR22 U0501.AR23 U0501.AR26 U0501.AR29 U0501.AR32 U0501.AR35 U0501.AR39 U0501.AT7 U0501.AT8 U0501.AT11 U0501.AT14 U0501.AT18 U0501.AT19 U0501.AT26 U0501.AT29 U0501.AT32 U0501.AT35 U0501.AT38 U0501.AU1 U0501.AU5 U0501.AU11 U0501.AU14 U0501.AU16 U0501.AU17 U0501.AU20 U0501.AU21 U0501.AU22 U0501.AU23 U0501.AU26 U0501.AU29 U0501.AU32 U0501.AU35 U0501.AU36 U0501.AV4 U0501.AV11 U0501.AV14 U0501.AV18 U0501.AV19 U0501.AV26 U0501.AV29 U0501.AV32 U0501.AW1 U0501.AW6 U0501.AW8 U0501.AW11 U0501.AW14 U0501.AW16 U0501.AW17 U0501.AW20 U0501.AW21 U0501.AW22 U0501.AW23 U0501.AW26 U0501.AW29 U0501.AW32 U0501.AY2 U0501.AY7 U0501.AY11 U0501.AY14 U0501.AY18 U0501.AY19 U0501.AY26 U0501.AY29 U0501.AY32 U0501.AY37 U0501.AY42 U0501.B2 U0501.B37 U0501.B42 U0501.BA3 U0501.BA5 U0501.BA11 U0501.BA14 U0501.BA16 U0501.BA17 U0501.BA20 U0501.BA26 U0501.BA35 U0501.BA39 U0501.C5 U0501.C35 U0501.C40 U0501.C43 U0501.D3 U0501.D8 U0501.D9 U0501.D33 U0501.D43 U0501.E1 U0501.E6 U0501.E17 U0501.E36 U0501.E38 U0501.E41 U0501.F4 U0501.F9 U0501.F14 U0501.F15 U0501.F20 U0501.F29 U0501.F34 U0501.F38 U0501.F39 U0501.F40 U0501.G2 U0501.G7 U0501.G12 U0501.G16 U0501.G18 U0501.G21 U0501.G23 U0501.G25 U0501.G32 U0501.G37 U0501.G39 U0501.G40 U0501.G42 U0501.H5 U0501.H10 U0501.H17 U0501.H21 U0501.H22 U0501.H23 U0501.H24 U0501.H30 U0501.H35 U0501.H37 U0501.H39 U0501.H40 U0501.J3 U0501.J8 U0501.J13 U0501.J20 U0501.J21 U0501.J22 U0501.J24 U0501.J33 U0501.J37 U0501.J38 U0501.J39 U0501.J40 U0501.J43 U0501.K1 U0501.K6 U0501.K11 U0501.K14 U0501.K17 U0501.K20 U0501.K22 U0501.K23 U0501.K31 U0501.K36 U0501.K38 U0501.K39 U0501.K41 U0501.L4 U0501.L9 U0501.L20 U0501.L21 U0501.L22 U0501.L25 U0501.L29 U0501.L34 U0501.L39 U0501.L40 U0501.M2 U0501.M7 U0501.M12 U0501.M14 U0501.M16 U0501.M18 U0501.M20 U0501.M22 U0501.M24 U0501.M26 U0501.M28 U0501.M30 U0501.M32 U0501.M37 U0501.M39 U0501.M40 U0501.M42 U0501.N5 U0501.N10 U0501.N35 U0501.N36 U0501.N40 U0501.P3 U0501.P8 U0501.P11 U0501.P33 U0501.P38 U0501.P40 U0501.P43 U0501.R1 U0501.R6 U0501.R36 U0501.R39 U0501.R40 U0501.R41 U0501.T4 U0501.T9 U0501.T34 U0501.T38 U0501.T39 U0501.T40 U0501.T41 U0501.U2 U0501.U7 U0501.U34 U0501.U36 U0501.U37 U0501.U38 U0501.U39 U0501.U42 U0501.V5 U0501.V10 U0501.V34 U0501.V35 U0501.V36 U0501.V37 U0501.V38 U0501.V39 U0501.V40 U0501.W3 U0501.W8 U0501.W34 U0501.W35 U0501.W38 U0501.W39 U0501.W43 U0501.Y1 U0501.Y6 U0501.Y11 U0501.Y33 U0501.Y36 U0501.Y41 U0504.A4 U0504.A6 U0504.A35 U0504.A41 U0504.AA3 U0504.AA9 U0504.AA34 U0504.AA38 U0504.AA39 U0504.AB4 U0504.AB7 U0504.AB37 U0504.AB40 U0504.AB42 U0504.AC2 U0504.AC5 U0504.AC7 U0504.AC9 U0504.AC36 U0504.AD11 U0504.AD33 U0504.AE2 U0504.AE7 U0504.AF5 U0504.AF35 U0504.AF38 U0504.AG3 U0504.AG9 U0504.AG11 U0504.AG33 U0504.AG43 U0504.AH1 U0504.AH7 U0504.AH34 U0504.AH37 U0504.AH38 U0504.AH39 U0504.AJ5 U0504.AJ34 U0504.AJ36 U0504.AK3 U0504.AK9 U0504.AK10 U0504.AK14 U0504.AK17 U0504.AK20 U0504.AK26 U0504.AK29 U0504.AK32 U0504.AK34 U0504.AK39 U0504.AL1 U0504.AL2 U0504.AL7 U0504.AL11 U0504.AL17 U0504.AL22 U0504.AL23 U0504.AL29 U0504.AL35 U0504.AL36 U0504.AM5 U0504.AM9 U0504.AM11 U0504.AM14 U0504.AM17 U0504.AM20 U0504.AM26 U0504.AM29 U0504.AM32 U0504.AM35 U0504.AM37 U0504.AM39 U0504.AN3 U0504.AN7 U0504.AN11 U0504.AN17 U0504.AN22 U0504.AN23 U0504.AN29 U0504.AN35 U0504.AP1 U0504.AP5 U0504.AP6 U0504.AP10 U0504.AP11 U0504.AP14 U0504.AP26 U0504.AP29 U0504.AP32 U0504.AP35 U0504.AP36 U0504.AP37 U0504.AP43 U0504.AR2 U0504.AR3 U0504.AR11 U0504.AR14 U0504.AR16 U0504.AR17 U0504.AR20 U0504.AR21 U0504.AR22 U0504.AR23 U0504.AR26 U0504.AR29 U0504.AR32 U0504.AR35 U0504.AR39 U0504.AT7 U0504.AT8 U0504.AT11 U0504.AT14 U0504.AT18 U0504.AT19 U0504.AT26 U0504.AT29 U0504.AT32 U0504.AT35 U0504.AT38 U0504.AU1 U0504.AU5 U0504.AU11 U0504.AU14 U0504.AU16 U0504.AU17 U0504.AU20 U0504.AU21 U0504.AU22 U0504.AU23 U0504.AU26 U0504.AU29 U0504.AU32 U0504.AU35 U0504.AU36 U0504.AV4 U0504.AV11 U0504.AV14 U0504.AV18 U0504.AV19 U0504.AV26 U0504.AV29 U0504.AV32 U0504.AW1 U0504.AW6 U0504.AW8 U0504.AW11 U0504.AW14 U0504.AW16 U0504.AW17 U0504.AW20 U0504.AW21 U0504.AW22 U0504.AW23 U0504.AW26 U0504.AW29 U0504.AW32 U0504.AY2 U0504.AY7 U0504.AY11 U0504.AY14 U0504.AY18 U0504.AY19 U0504.AY26 U0504.AY29 U0504.AY32 U0504.AY37 U0504.AY42 U0504.B2 U0504.B37 U0504.B42 U0504.BA3 U0504.BA5 U0504.BA11 U0504.BA14 U0504.BA16 U0504.BA17 U0504.BA20 U0504.BA26 U0504.BA35 U0504.BA39 U0504.C5 U0504.C35 U0504.C40 U0504.C43 U0504.D3 U0504.D8 U0504.D9 U0504.D33 U0504.D43 U0504.E1 U0504.E6 U0504.E17 U0504.E36 U0504.E38 U0504.E41 U0504.F4 U0504.F9 U0504.F14 U0504.F15 U0504.F20 U0504.F29 U0504.F34 U0504.F38 U0504.F39 U0504.F40 U0504.G2 U0504.G7 U0504.G12 U0504.G16 U0504.G18 U0504.G21 U0504.G23 U0504.G25 U0504.G32 U0504.G37 U0504.G39 U0504.G40 U0504.G42 U0504.H5 U0504.H10 U0504.H17 U0504.H21 U0504.H22 U0504.H23 U0504.H24 U0504.H30 U0504.H35 U0504.H37 U0504.H39 U0504.H40 U0504.J3 U0504.J8 U0504.J13 U0504.J20 U0504.J21 U0504.J22 U0504.J24 U0504.J33 U0504.J37 U0504.J38 U0504.J39 U0504.J40 U0504.J43 U0504.K1 U0504.K6 U0504.K11 U0504.K14 U0504.K17 U0504.K20 U0504.K22 U0504.K23 U0504.K31 U0504.K36 U0504.K38 U0504.K39 U0504.K41 U0504.L4 U0504.L9 U0504.L20 U0504.L21 U0504.L22 U0504.L25 U0504.L29 U0504.L34 U0504.L39 U0504.L40 U0504.M2 U0504.M7 U0504.M12 U0504.M14 U0504.M16 U0504.M18 U0504.M20 U0504.M22 U0504.M24 U0504.M26 U0504.M28 U0504.M30 U0504.M32 U0504.M37 U0504.M39 U0504.M40 U0504.M42 U0504.N5 U0504.N10 U0504.N35 U0504.N36 U0504.N40 U0504.P3 U0504.P8 U0504.P11 U0504.P33 U0504.P38 U0504.P40 U0504.P43 U0504.R1 U0504.R6 U0504.R36 U0504.R39 U0504.R40 U0504.R41 U0504.T4 U0504.T9 U0504.T34 U0504.T38 U0504.T39 U0504.T40 U0504.T41 U0504.U2 U0504.U7 U0504.U34 U0504.U36 U0504.U37 U0504.U38 U0504.U39 U0504.U42 U0504.V5 U0504.V10 U0504.V34 U0504.V35 U0504.V36 U0504.V37 U0504.V38 U0504.V39 U0504.V40 U0504.W3 U0504.W8 U0504.W34 U0504.W35 U0504.W38 U0504.W39 U0504.W43 U0504.Y1 U0504.Y6 U0504.Y11 U0504.Y33 U0504.Y36 U0504.Y41 U0509.A4 U0509.A6 U0509.A35 U0509.A41 U0509.AA3 U0509.AA9 U0509.AA34 U0509.AA38 U0509.AA39 U0509.AB4 U0509.AB7 U0509.AB37 U0509.AB40 U0509.AB42 U0509.AC2 U0509.AC5 U0509.AC7 U0509.AC9 U0509.AC36 U0509.AD11 U0509.AD33 U0509.AE2 U0509.AE7 U0509.AF5 U0509.AF35 U0509.AF38 U0509.AG3 U0509.AG9 U0509.AG11 U0509.AG33 U0509.AG43 U0509.AH1 U0509.AH7 U0509.AH34 U0509.AH37 U0509.AH38 U0509.AH39 U0509.AJ5 U0509.AJ34 U0509.AJ36 U0509.AK3 U0509.AK9 U0509.AK10 U0509.AK14 U0509.AK17 U0509.AK20 U0509.AK26 U0509.AK29 U0509.AK32 U0509.AK34 U0509.AK39 U0509.AL1 U0509.AL2 U0509.AL7 U0509.AL11 U0509.AL17 U0509.AL22 U0509.AL23 U0509.AL29 U0509.AL35 U0509.AL36 U0509.AM5 U0509.AM9 U0509.AM11 U0509.AM14 U0509.AM17 U0509.AM20 U0509.AM26 U0509.AM29 U0509.AM32 U0509.AM35 U0509.AM37 U0509.AM39 U0509.AN3 U0509.AN7 U0509.AN11 U0509.AN17 U0509.AN22 U0509.AN23 U0509.AN29 U0509.AN35 U0509.AP1 U0509.AP5 U0509.AP6 U0509.AP10 U0509.AP11 U0509.AP14 U0509.AP26 U0509.AP29 U0509.AP32 U0509.AP35 U0509.AP36 U0509.AP37 U0509.AP43 U0509.AR2 U0509.AR3 U0509.AR11 U0509.AR14 U0509.AR16 U0509.AR17 U0509.AR20 U0509.AR21 U0509.AR22 U0509.AR23 U0509.AR26 U0509.AR29 U0509.AR32 U0509.AR35 U0509.AR39 U0509.AT7 U0509.AT8 U0509.AT11 U0509.AT14 U0509.AT18 U0509.AT19 U0509.AT26 U0509.AT29 U0509.AT32 U0509.AT35 U0509.AT38 U0509.AU1 U0509.AU5 U0509.AU11 U0509.AU14 U0509.AU16 U0509.AU17 U0509.AU20 U0509.AU21 U0509.AU22 U0509.AU23 U0509.AU26 U0509.AU29 U0509.AU32 U0509.AU35 U0509.AU36 U0509.AV4 U0509.AV11 U0509.AV14 U0509.AV18 U0509.AV19 U0509.AV26 U0509.AV29 U0509.AV32 U0509.AW1 U0509.AW6 U0509.AW8 U0509.AW11 U0509.AW14 U0509.AW16 U0509.AW17 U0509.AW20 U0509.AW21 U0509.AW22 U0509.AW23 U0509.AW26 U0509.AW29 U0509.AW32 U0509.AY2 U0509.AY7 U0509.AY11 U0509.AY14 U0509.AY18 U0509.AY19 U0509.AY26 U0509.AY29 U0509.AY32 U0509.AY37 U0509.AY42 U0509.B2 U0509.B37 U0509.B42 U0509.BA3 U0509.BA5 U0509.BA11 U0509.BA14 U0509.BA16 U0509.BA17 U0509.BA20 U0509.BA26 U0509.BA35 U0509.BA39 U0509.C5 U0509.C35 U0509.C40 U0509.C43 U0509.D3 U0509.D8 U0509.D9 U0509.D33 U0509.D43 U0509.E1 U0509.E6 U0509.E17 U0509.E36 U0509.E38 U0509.E41 U0509.F4 U0509.F9 U0509.F14 U0509.F15 U0509.F20 U0509.F29 U0509.F34 U0509.F38 U0509.F39 U0509.F40 U0509.G2 U0509.G7 U0509.G12 U0509.G16 U0509.G18 U0509.G21 U0509.G23 U0509.G25 U0509.G32 U0509.G37 U0509.G39 U0509.G40 U0509.G42 U0509.H5 U0509.H10 U0509.H17 U0509.H21 U0509.H22 U0509.H23 U0509.H24 U0509.H30 U0509.H35 U0509.H37 U0509.H39 U0509.H40 U0509.J3 U0509.J8 U0509.J13 U0509.J20 U0509.J21 U0509.J22 U0509.J24 U0509.J33 U0509.J37 U0509.J38 U0509.J39 U0509.J40 U0509.J43 U0509.K1 U0509.K6 U0509.K11 U0509.K14 U0509.K17 U0509.K20 U0509.K22 U0509.K23 U0509.K31 U0509.K36 U0509.K38 U0509.K39 U0509.K41 U0509.L4 U0509.L9 U0509.L20 U0509.L21 U0509.L22 U0509.L25 U0509.L29 U0509.L34 U0509.L39 U0509.L40 U0509.M2 U0509.M7 U0509.M12 U0509.M14 U0509.M16 U0509.M18 U0509.M20 U0509.M22 U0509.M24 U0509.M26 U0509.M28 U0509.M30 U0509.M32 U0509.M37 U0509.M39 U0509.M40 U0509.M42 U0509.N5 U0509.N10 U0509.N35 U0509.N36 U0509.N40 U0509.P3 U0509.P8 U0509.P11 U0509.P33 U0509.P38 U0509.P40 U0509.P43 U0509.R1 U0509.R6 U0509.R36 U0509.R39 U0509.R40 U0509.R41 U0509.T4 U0509.T9 U0509.T34 U0509.T38 U0509.T39 U0509.T40 U0509.T41 U0509.U2 U0509.U7 U0509.U34 U0509.U36 U0509.U37 U0509.U38 U0509.U39 U0509.U42 U0509.V5 U0509.V10 U0509.V34 U0509.V35 U0509.V36 U0509.V37 U0509.V38 U0509.V39 U0509.V40 U0509.W3 U0509.W8 U0509.W34 U0509.W35 U0509.W38 U0509.W39 U0509.W43 U0509.Y1 U0509.Y6 U0509.Y11 U0509.Y33 U0509.Y36 U0509.Y41
VCCPLL: U0500.U33 U0500.V33 U0500.W33 U0501.U33 U0501.V33 U0501.W33 U0504.U33 U0504.V33 U0504.W33 U0509.U33 U0509.V33 U0509.W33
VDDQ: U0500.M17 U0500.M27 U0501.M17 U0501.M27 U0504.M17 U0504.M27 U0509.M17 U0509.M27
VSS_SENSE: U0504.AR8
VSS_SENSE_VTT: U0504.AE37
+0_75V: U0500.AA10 U0500.AA11 U0500.AA33 U0500.AB8 U0500.AB9 U0500.AB10 U0500.AB11 U0500.AB33 U0500.AB34 U0500.AC10 U0500.AC11 U0500.AC33 U0500.AC34 U0500.AC35 U0500.AD9 U0500.AD10 U0500.AD34 U0500.AD35 U0500.AD36 U0500.AE8 U0500.AE9 U0500.AE10 U0500.AE11 U0500.AE33 U0500.AE34 U0500.AE35 U0500.AF8 U0500.AF9 U0500.AF11 U0500.AF33 U0500.AF34 U0500.AF36 U0500.AF37 U0500.AG34 U0501.AA10 U0501.AA11 U0501.AA33 U0501.AB8 U0501.AB9 U0501.AB10 U0501.AB11 U0501.AB33 U0501.AB34 U0501.AC10 U0501.AC11 U0501.AC33 U0501.AC34 U0501.AC35 U0501.AD9 U0501.AD10 U0501.AD34 U0501.AD35 U0501.AD36 U0501.AE8 U0501.AE9 U0501.AE10 U0501.AE11 U0501.AE33 U0501.AE34 U0501.AE35 U0501.AF8 U0501.AF9 U0501.AF11 U0501.AF33 U0501.AF34 U0501.AF36 U0501.AF37 U0501.AG34 U0504.AA10 U0504.AA11 U0504.AA33 U0504.AB8 U0504.AB9 U0504.AB10 U0504.AB11 U0504.AB33 U0504.AB34 U0504.AC10 U0504.AC11 U0504.AC33 U0504.AC34 U0504.AC35 U0504.AD9 U0504.AD10 U0504.AD34 U0504.AD35 U0504.AD36 U0504.AE8 U0504.AE9 U0504.AE10 U0504.AE11 U0504.AE33 U0504.AE34 U0504.AE35 U0504.AF8 U0504.AF9 U0504.AF11 U0504.AF33 U0504.AF34 U0504.AF36 U0504.AF37 U0504.AG34 U0509.AA10 U0509.AA11 U0509.AA33 U0509.AB8 U0509.AB9 U0509.AB10 U0509.AB11 U0509.AB33 U0509.AB34 U0509.AC10 U0509.AC11 U0509.AC33 U0509.AC34 U0509.AC35 U0509.AD9 U0509.AD10 U0509.AD34 U0509.AD35 U0509.AD36 U0509.AE8 U0509.AE9 U0509.AE10 U0509.AE11 U0509.AE33 U0509.AE34 U0509.AE35 U0509.AF8 U0509.AF9 U0509.AF11 U0509.AF33 U0509.AF34 U0509.AF36 U0509.AF37 U0509.AG34
+1_5V: U0500.A9 U0500.A14 U0500.A19 U0500.A24 U0500.A29 U0500.B7 U0500.B12 U0500.B17 U0500.B22 U0500.B27 U0500.B32 U0500.C10 U0500.C15 U0500.C20 U0500.C25 U0500.C30 U0500.D13 U0500.D18 U0500.D23 U0500.D28 U0500.E11 U0500.E16 U0500.E21 U0500.E26 U0500.E31 U0500.F19 U0500.F24 U0500.G17 U0500.G22 U0500.G27 U0500.H15 U0500.H20 U0500.H25 U0500.J18 U0500.J23 U0500.J28 U0500.K16 U0500.K21 U0500.K26 U0500.L14 U0500.L19 U0500.L24 U0501.A9 U0501.A14 U0501.A19 U0501.A24 U0501.A29 U0501.B7 U0501.B12 U0501.B17 U0501.B22 U0501.B27 U0501.B32 U0501.C10 U0501.C15 U0501.C20 U0501.C25 U0501.C30 U0501.D13 U0501.D18 U0501.D23 U0501.D28 U0501.E11 U0501.E16 U0501.E21 U0501.E26 U0501.E31 U0501.F19 U0501.F24 U0501.G17 U0501.G22 U0501.G27 U0501.H15 U0501.H20 U0501.H25 U0501.J18 U0501.J23 U0501.J28 U0501.K16 U0501.K21 U0501.K26 U0501.L14 U0501.L19 U0501.L24 U0504.A9 U0504.A14 U0504.A19 U0504.A24 U0504.A29 U0504.B7 U0504.B12 U0504.B17 U0504.B22 U0504.B27 U0504.B32 U0504.C10 U0504.C15 U0504.C20 U0504.C25 U0504.C30 U0504.D13 U0504.D18 U0504.D23 U0504.D28 U0504.E11 U0504.E16 U0504.E21 U0504.E26 U0504.E31 U0504.F19 U0504.F24 U0504.G17 U0504.G22 U0504.G27 U0504.H15 U0504.H20 U0504.H25 U0504.J18 U0504.J23 U0504.J28 U0504.K16 U0504.K21 U0504.K26 U0504.L14 U0504.L19 U0504.L24 U0509.A9 U0509.A14 U0509.A19 U0509.A24 U0509.A29 U0509.B7 U0509.B12 U0509.B17 U0509.B22 U0509.B27 U0509.B32 U0509.C10 U0509.C15 U0509.C20 U0509.C25 U0509.C30 U0509.D13 U0509.D18 U0509.D23 U0509.D28 U0509.E11 U0509.E16 U0509.E21 U0509.E26 U0509.E31 U0509.F19 U0509.F24 U0509.G17 U0509.G22 U0509.G27 U0509.H15 U0509.H20 U0509.H25 U0509.J18 U0509.J23 U0509.J28 U0509.K16 U0509.K21 U0509.K26 U0509.L14 U0509.L19 U0509.L24
